# Altium PCB protel_wireless_receiver.PcbDoc
Units mil, origin at the board's own origin, x right, y up, seen from the top; angles counter-clockwise.
Board outline 2500 x 2000 mil, 2 copper layers (Top Layer, Bottom Layer); 21 components, 24 nets, 61 pads, 6 vias.
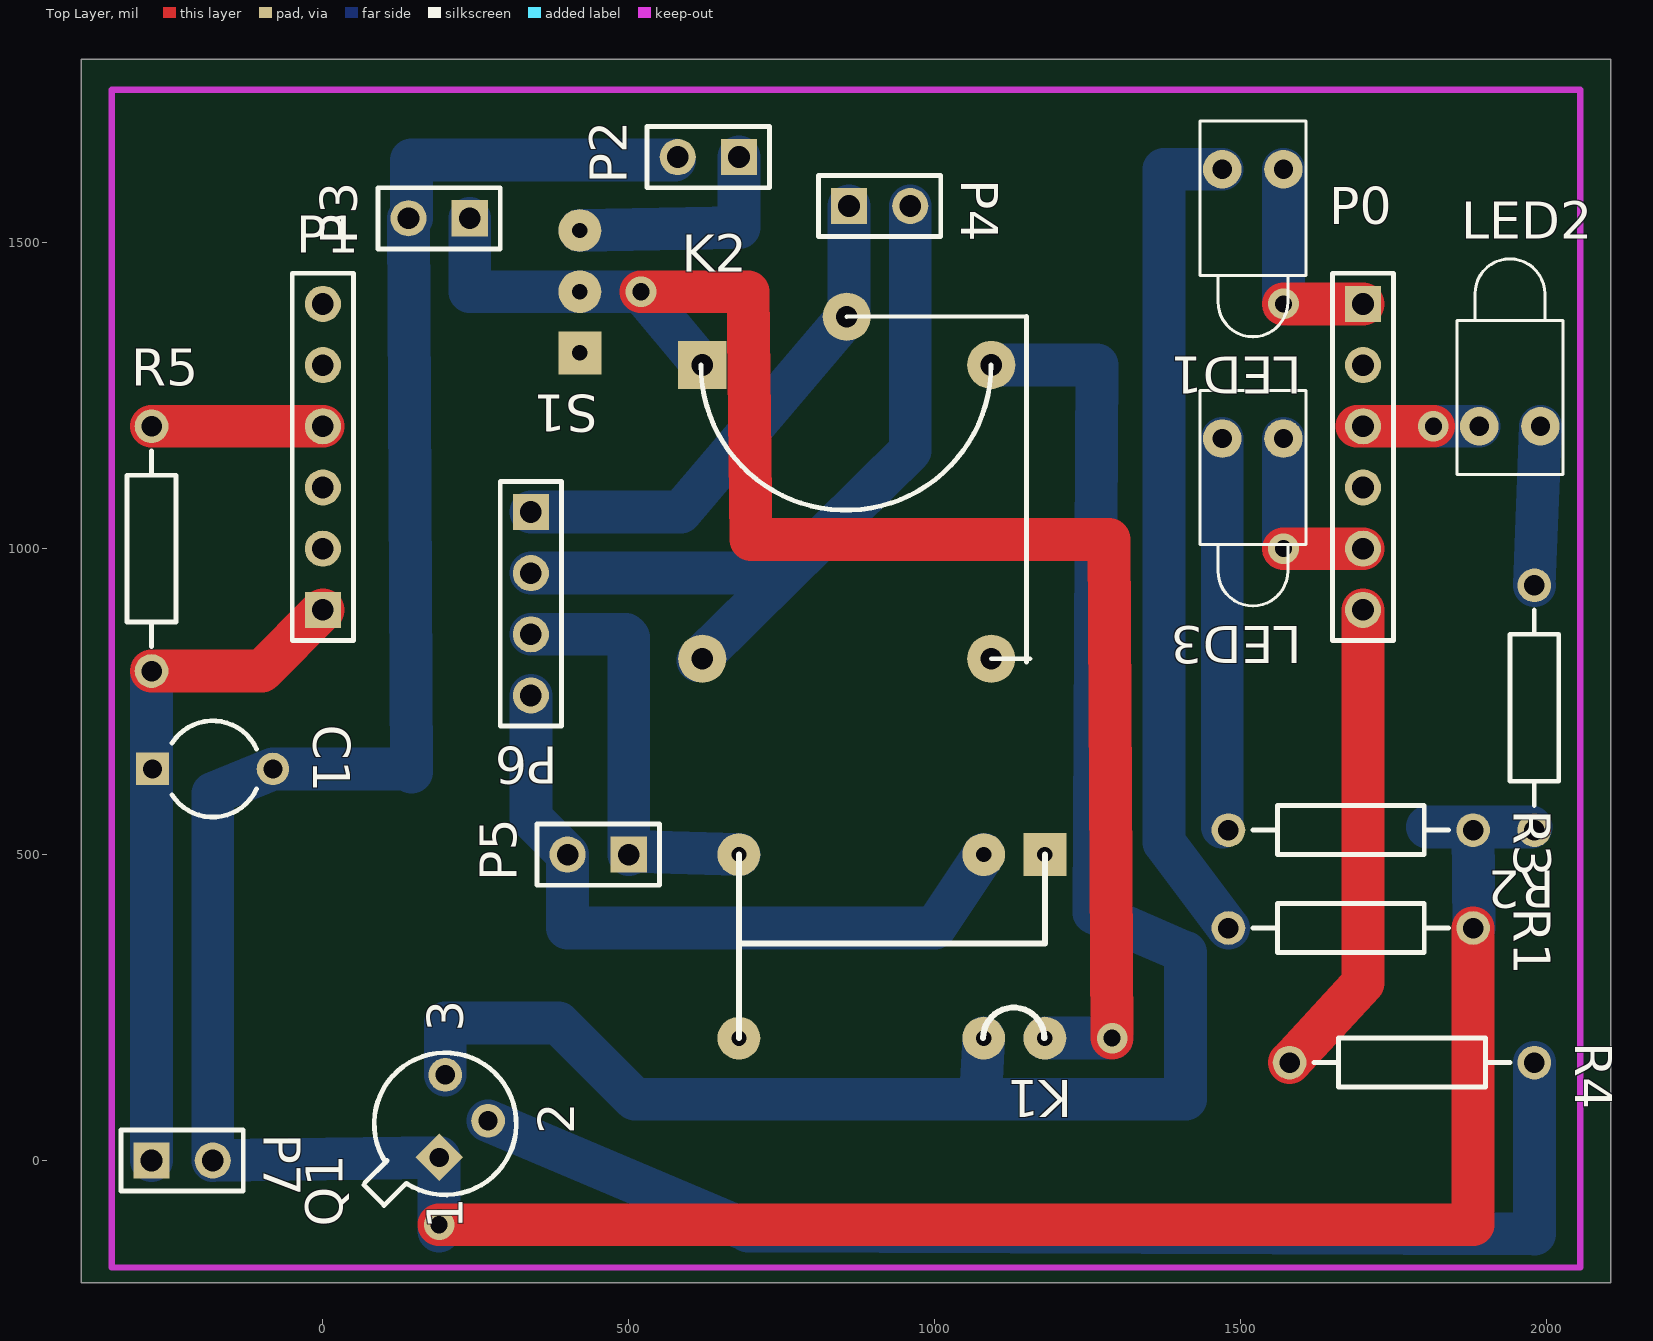
[diagram p0: Top Layer view]
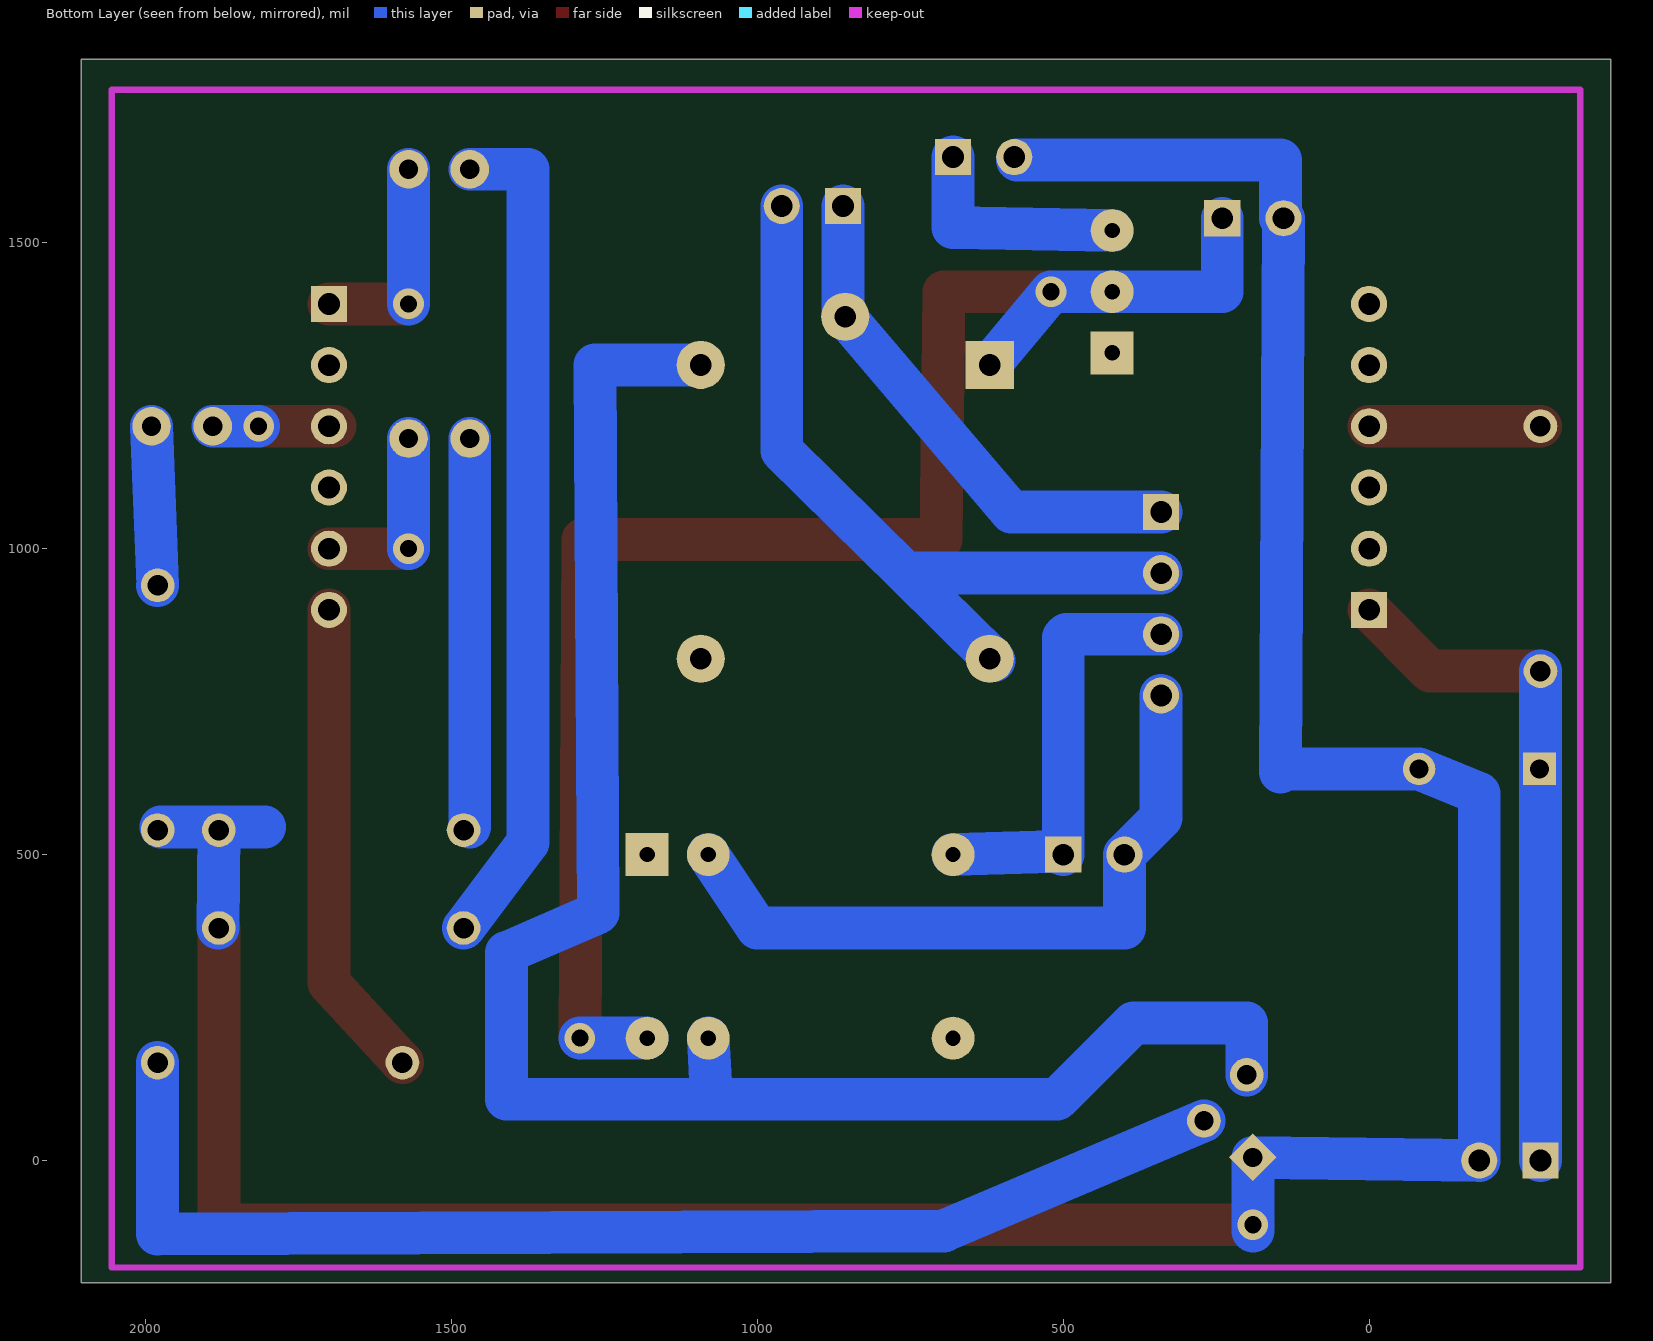
[diagram p1: Bottom Layer view, seen from below]

## Layer stack, top to bottom
Top Layer: signal copper 1.4
Dielectric: dielectric 12.6, FR-4, Dk 4.8
Bottom Layer: signal copper 1.4

## Board outline
-395,-200 2105,-200 2105,1800 -395,1800

## Design rules (kind name [scope] priority, off if disabled: settings)
Clearance Clearance_2 [All] p1: gap=10
Clearance Clearance_1 [All] p2: gap=10
Clearance [All] p3: gap=13
ComponentClearance [All] p1: gap=10 collisioncheckmode=0
PolygonConnect [All] p1: connectstyle=Relief reliefconductorwidth=10 reliefentries=4 polygonreliefangle="90 Angle"
RoutingVias [All] p1: holewidth=32 width=62 viastyle="Through Hole" minholewidth=28 minwidth=50 maxholewidth=28 maxwidth=50
SolderMaskExpansion [All] p1: expansion=4
TestPointUsage [All] p1: valid=0 allowmultiple=FALSE
Testpoint [All] p1: side=15 testpointundercomponent=TRUE minsize=40 maxsize=100 preferedsize=60 minholesize=0 maxholesize=40 preferedholesize=32 testpointgrid=1 style=1023 order=-539222988
Width [All] p1: maxlimit=70 minlimit=70 preferedwidth=70
17 further rules are at their usual default settings.

## Components (designator, comment, footprint, x,y, rotation, side; value= is the part's Value field where it differs from the comment)
C1 "Cap2" CAPR5-4X5 -180,640 r0 top
K1 "Relay 12V" "relay 6pin" 1180,500 r270 top
K2 "Relay 50V" "JS relay" 620,820 r0 top
LED1 "Green" LED-1 1520,1620 r270 top
LED2 "Red" LED-1 1940,1200 r90 top
LED3 "Yellow" LED-1 1520,1180 r270 top
P0 "I/O" HDR1X6 1700,1400 r270 top
P1 "I/O" HDR1X6 0,900 r90 top
P2 "12 volts connector" HDR1X2 680,1640 r180 top
P3 "Arduino Power" HDR1X2 240,1540 r180 top
P4 "E path 50V" HDR1X2 860,1560 r0 top
P5 "E path 12V" HDR1X2 500,500 r180 top
P6 "Switch DPDT" HDR1X4 340,1060 r270 top
P7 "Switch SPST" HDR1X2 -280,0 r0 top
Q1 "2N2222" CAN-3/D5.9 200,60 r90 top
R1 "Res" AXIAL-0.4 1680,380 r0 top
R2 "Res" AXIAL-0.4 1980,740 r270 top
R3 "Res" AXIAL-0.4 1680,540 r0 top
R4 "Res" AXIAL-0.4 1780,160 r0 top
R5 "Res" AXIAL-0.4 -280,1000 r90 top
S1 "SW-SPDT" SPDT 420,1320 r180 top

## Footprints (in the part's own frame and the unit in brackets; to place one, negate y for a bottom-side part, rotate by r counter-clockwise, add the part's x,y. Pads: shape width x height; smd on the part's side, far side on the other; paste and mask are expansions set on the pad)
AXIAL-0.4 [mm] "Resistor; 2 Leads"
  round 1.4 hole 0.85: 1(-5.08,0) 2(5.08,0)
  silkscreen extent -4.06,-1.02 4.06,1.02
CAN-3/D5.9 [mm] "Can; 3 Leads; Pin Circle Dia. 2.54 mm"
  rect 1.4x1.4 hole 0.8 rot 45: 1(-1.397,0.254)
  round 1.4 hole 0.8: 2(0.127,-1.778) 3(2.032,0)
  silkscreen extent -3.39,-2.95 2.95,3.39
CAPR5-4X5 [mm] "Capacitor; 2 Leads"
  rect 1.35x1.35 hole 0.8: 1(-2.5,0)
  round 1.35 hole 0.8: 2(2.5,0)
  silkscreen extent -1.69,-2 1.82,2
HDR1X2 [mm] "Connector; Header; 2 Position"
  rect 1.5x1.5 hole 0.9: 1(0,0)
  round 1.5 hole 0.9: 2(2.54,0)
  silkscreen extent -1.27,-1.27 3.81,1.27
HDR1X4 [mm] "Connector; Header; 4 Position"
  rect 1.5x1.5 hole 0.9: 1(0,0)
  round 1.5 hole 0.9: 2(2.54,0) 3(5.08,0) 4(7.62,0)
  silkscreen extent -1.27,-1.27 8.89,1.27
HDR1X6 [mm] "Connector; Header; 6 Position"
  rect 1.5x1.5 hole 0.9: 1(0,0)
  round 1.5 hole 0.9: 2(2.54,0) 3(5.08,0) 4(7.62,0) 5(10.16,0) 6(12.7,0)
  silkscreen extent -1.27,-1.27 13.97,1.27
"JS relay" [mm]
  round 2 hole 0.9: 1(6,14.2) 2(12,0) 3(0,0) 5(12,12.2)
  rect 2x2 hole 0.9: 4(0,12.2)
  silkscreen extent -0.06,-0.13 13.61,14.22
LED-1 [mm] "Typical RED GaAs LED; 2 Leads"
  round 1.6 hole 0.8: 1(0,1.27) 2(0,-1.27)
  silkscreen extent -2,-2.2 6.95,2.2
"relay 6pin" [mil]
  round 70 hole 25: 1(0,-500) 3(0,-100) 4(300,0) 5(300,-100) 6(300,-500)
  rect 70x70 hole 25: 2(0,0)
  silkscreen extent 0,-500 300,0
SPDT [mil]
  rect 70x70 hole 25: 1(0,0)
  round 70 hole 25: 2(0,-100) 3(0,-200)

## Part data
C1: "Capacitor"
K1 K2: library part Relay, "SPDT Relay"
LED1 LED2 LED3: library part LED1, "Typical RED GaAs LED"
P0 P1: library part "Header 6", "Header, 6-Pin"
P2 P3 P4 P5 P7: library part "Header 2", "Header, 2-Pin"
P6: library part "Header 4", "Header, 4-Pin"
Q1: "General Purpose Transistor NPN Silicon"
R1 R2 R3 R4 R5: library part Res2, "Resistor"
S1: "SPDT Subminiature Toggle Switch, Right Angle Mounting, Vertical Actuation"

## Via types
v1: diameter 50, hole 28, Top Layer to Bottom Layer, 6 vias

## Nets (pads, with @x,y where several pads share a name; then routed paths per layer and width w, separated by ;. In a path a pad name is that pad's centre, name@x,y a point inside that pad or via, vN(x,y) a via of type N, cw(c..) or ccw(c..) an arc to the next point about the centre after c; other vN are vias at no path point)
2: P0.6 R4.1 | length 786.9
  Top Layer w70: R4.1 1700,290 P0.6
3: LED3.1 P0.5 | length 310
  Top Layer w70: v1(1570,1000) P0.5
  Bottom Layer w70: v1(1570,1000) LED3.1
4: P0.4
5: LED2.1 P0.3 | length 200
  Top Layer w70: P0.3@1690,1200 v1(1815,1200)
  Bottom Layer w70: v1(1815,1200) LED2.1
6: P0.2
7: LED1.1 P0.1 | length 350
  Top Layer w70: v1(1570,1400) P0.1
  Bottom Layer w70: v1(1570,1400) LED1.1
12V: K1.4 K2.4 P3.1 S1.2 | length 2646
  Top Layer w70: v1(520,1420) 695,1420 700,1015 1285,1015 v1(1290,200)
  Bottom Layer w70: P3.1 240,1420 S1.2 v1(520,1420) K2.4 ; K1.4 v1(1290,200)
A0: P1.6
A1: P1.5
A2: P1.4 R5.2 | length 280
  Top Layer w70: R5.2 P1.4
A3: P1.3
A4: P1.2
A5: C1.1 P1.1 P7.1 R5.1 | length 1121.4
  Top Layer w70: R5.1 -100,800 P1.1
  Bottom Layer w70: P7.1 R5.1
G1: K1.1 P5.1 P6.3 | length 698
  Bottom Layer w70: P6.3 495,860 500,855 P5.1 515,505 K1.1
G2: K1.3 P5.2 P6.4 | length 1149.1
  Bottom Layer w70: P6.4 340,560 P5.2 400,380 1000,380 K1.3
GND: C1.2 P2.2 P3.2 P7.2 Q1.1 R1.2 R2.2 R3.2 | length 5337.9
  Top Layer w70: v1(190,-105) 1880,-105 R1.2
  Bottom Layer w70: 125,640 C1.2 -180,600 P7.2 Q1.1 v1@190,-115 ; P3.2 145,635 ; P3.2@145,1540 145,1635 P2.2@575,1635 ; 1805,545 R2.2@1975,545 ; R3.2 R1.2@1881.43,380.01
NetK1_5: K1.5 K2.5 Q1.3 | length 2918
  Bottom Layer w70: Q1.3 200,225 385,225 510,100 1075,100 ; K1.5 1075,100 ; K2.5 1265,1300 1260,405 1410,340 1410,100 1075,100
NetLED1_2: LED1.2 R1.1 | length 1370
  Bottom Layer w70: LED1.2 1375,1620 1375,520 R1.1
NetLED2_2: LED2.2 R2.1 | length 260.2
  Bottom Layer w70: R2.1 LED2.2
NetLED3_2: LED3.2 R3.1 | length 635
  Bottom Layer w70: R3.1@1470,545 LED3.2
NetP2_1: P2.1 S1.3 | length 375
  Bottom Layer w70: S1.3 680,1525 P2.1
NetQ1_2: Q1.2 R4.2 | length 2026.6
  Bottom Layer w70: Q1.2 695,-115 1980,-120 R4.2
R1: K2.1 P4.1 P6.1 | length 840.9
  Bottom Layer w70: P6.1 585,1060 K2.1 ; K2.1@860,1382.84 P4.1
R2: K2.3 P4.2 P6.2 | length 1302.9
  Bottom Layer w70: P6.2 755,960 ; K2.3@612.62,817.38 617.67,822.36 756.1,958.89 960,1160 P4.2
pads on no net: K1.2 K1.6 K2.2 S1.1

## Keep-outs
Keep-Out Layer:
  lines w10: -345,-175 2055,-175 2055,1750 -345,1750 -345,-175

## Dimensions
-345,-175 to 2055,-175 on Mechanical 1
-345,-175 to -345,1750 on Mechanical 1

## Text inside footprints (layer, text, board x,y; h text height)
K1: Top Paste "NC" at 1165,865 h60 r270
Q1: Top Overlay "3" at 229.21,210.08 h59.05 r90; Top Overlay "2" at 410.83,42.56 h59.05 r90; Top Overlay "1" at 228.31,-112.44 h59.06 r90